# Altium PCB 驱动2.PcbDoc
Units mil, origin at the board's own origin, x right, y up, seen from the top; angles counter-clockwise.
Board outline 4485 x 2050.55 mil, 2 copper layers (Top Layer, Bottom Layer); 41 components, 33 nets, 128 pads, 48 vias.
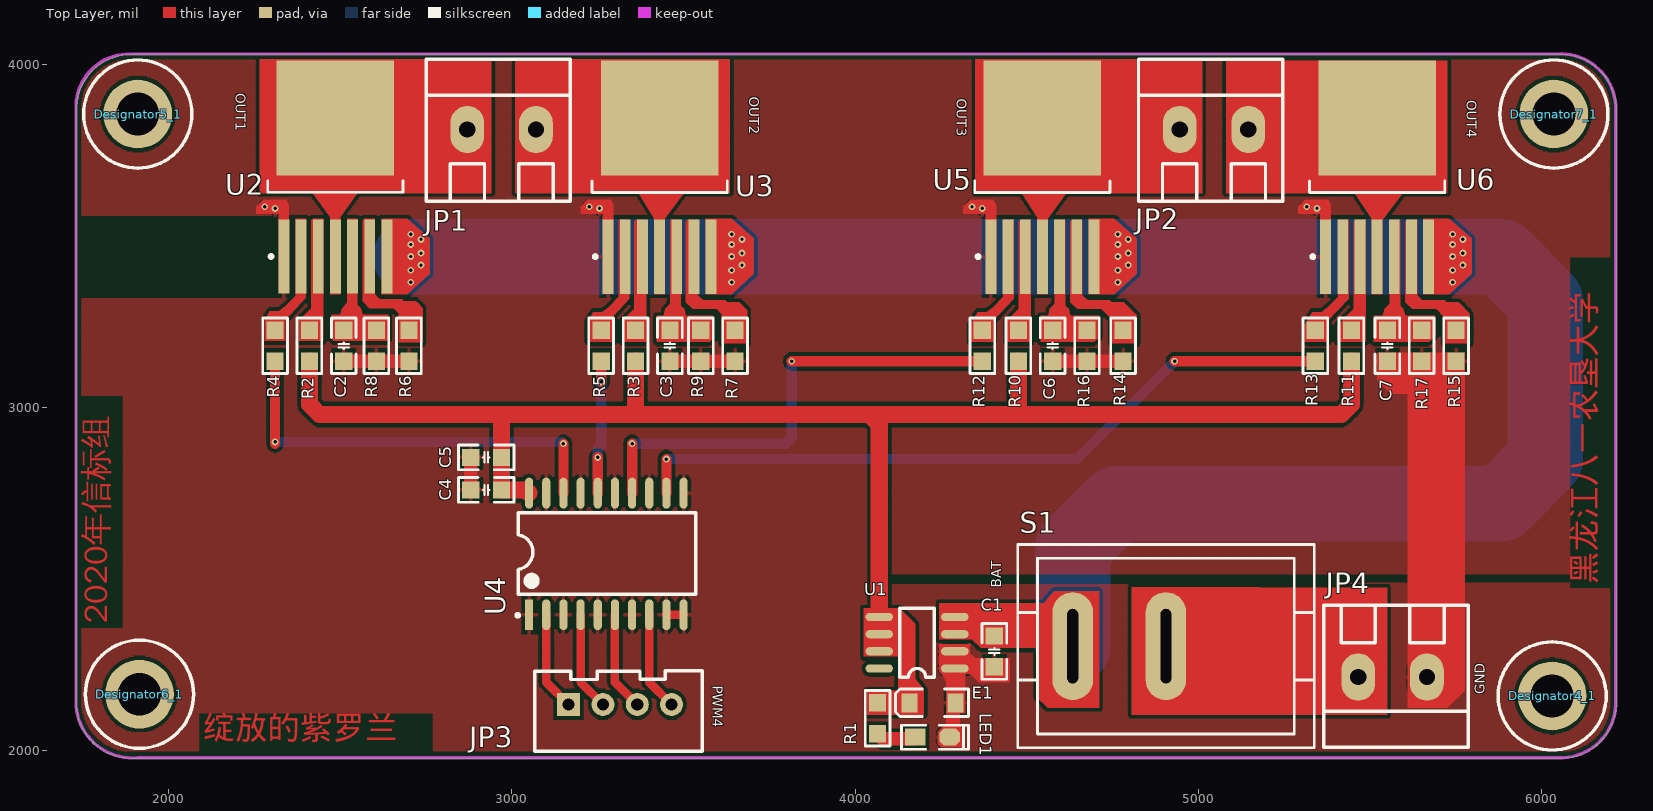
[diagram p0: Top Layer view]
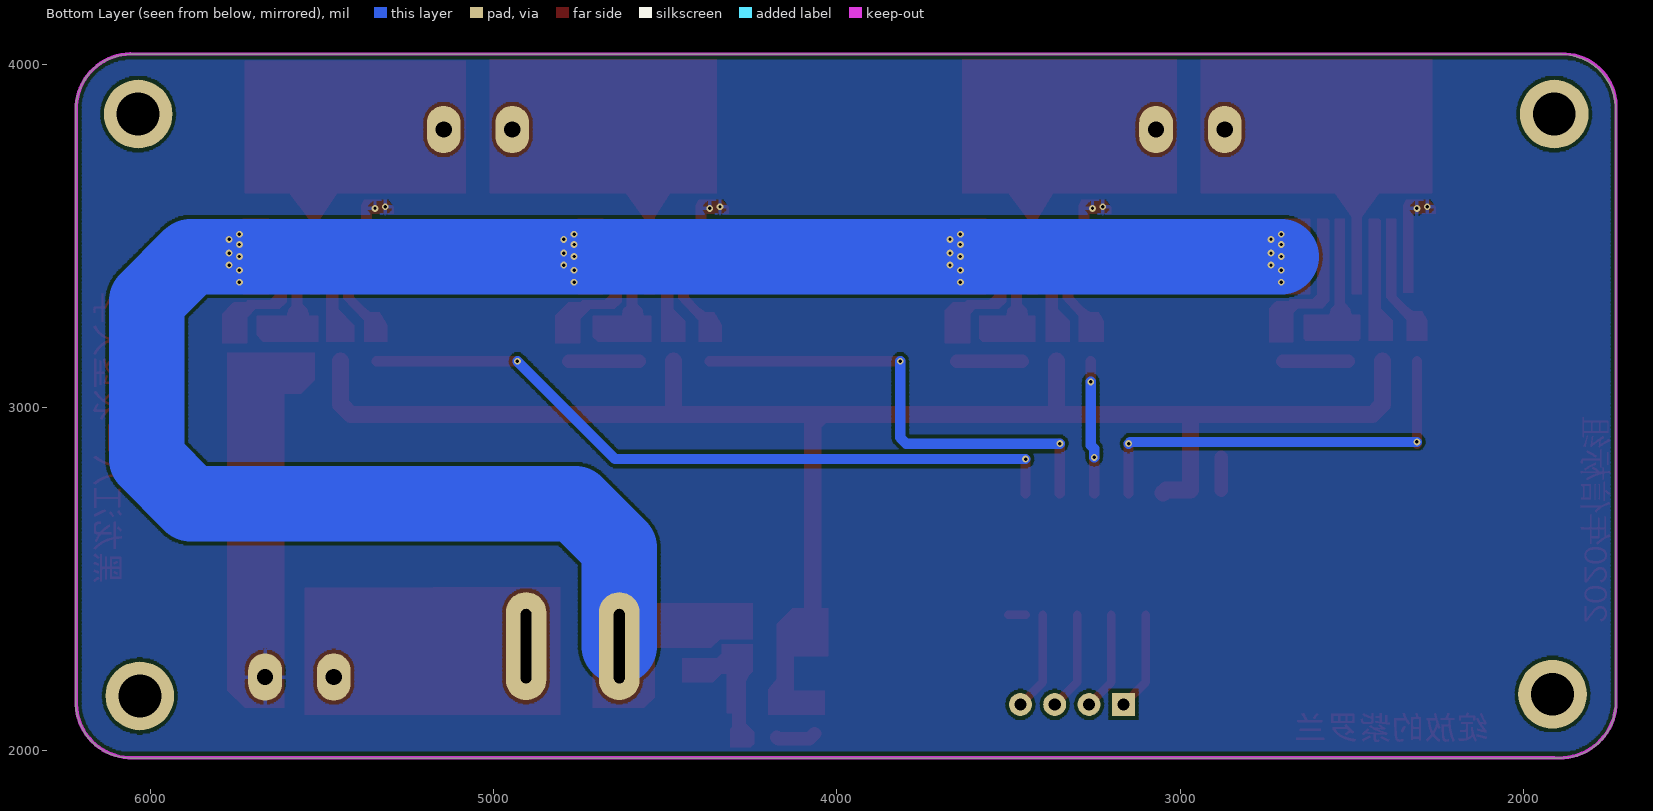
[diagram p1: Bottom Layer view, seen from below]

## Layer stack, top to bottom
Top Solder: solder mask 0.4, Solder Resist, Dk 3.5
Top Layer: signal copper 1.4
Dielectric 1: dielectric 12.6, FR-4, Dk 4.8
Bottom Layer: signal copper 1.4
Bottom Solder: solder mask 0.4, Solder Resist, Dk 3.5

## Board outline
1731,2130 1731,3878 cw(c1892,3868) 1902,4029 6045,4029 cw(c6055,3868) 6216,3878 6216,2130 cw(c6055,2140) 6045,1979 1902,1979 cw(c1892,2140)

## Design rules (kind name [scope] priority, off if disabled: settings)
Clearance [All] p1: gap=10 ignorepadtopadclearanceinfootprint=FALSE except(0: Arc-Hole Track-Hole SMDPad-Hole THPad-Hole Via-Hole Fill-Hole Poly-Hole Region-Hole Text-Hole)
HoleSize [All] p1: absolutevalues=TRUE maxlimit=300 minlimit=1 maxpercent=80.000 minpercent=20.000
HoleToHoleClearance [All] p1: gap=0 allowstackedmicrovias=TRUE
MinimumSolderMaskSliver [All] p1: minsoldermaskwidth=0
PolygonConnect [All] p1: connectstyle=Relief reliefconductorwidth=10 reliefentries=4 polygonreliefangle="90 Angle" airgapwidth=10
RoutingVias [All] p1: holewidth=20 width=20 viastyle="Through Hole" minholewidth=10 minwidth=20 maxholewidth=20 maxwidth=50
SilkToSilkClearance [All] p1: silktosilkclearance=0
SilkToSolderMaskClearance [IsPad] p1: minsilkscreentomaskgap=0 clearancetoexposedcopper=TRUE
SolderMaskExpansion [All] p1: expansion=4 istentingtop=FALSE
Width [All] p1: maxlimit=230 minlimit=10 preferedwidth=60
25 further rules are at their usual default settings.

## Classes and differential pairs
component class 驱动2: C1 C2 C3 C4 C5 C6 C7 E1 JP1 JP2 JP3 JP4 LED1 R1 R2 R3 R4 R5 R6 R7 R8 R9 R10 R11 R12 R13 R14 R15 R16 R17 S1 U1 U2 U3 U4 U5 U6

## Components (designator, comment, footprint, x,y, rotation, side; value= is the part's Value field where it differs from the comment)
C1 "104" "C 0805_M" 4405,2290 r90 top
C2 "104" "C 0805_M" 2510,3180 r270 top
C3 "104" "C 0805_M" 3460,3180 r270 top
C4 "104" "C 0805_M" 2925,2760 r180 top
C5 "104" "C 0805_M" 2925,2855 r180 top
C6 "104" "C 0805_M" 4575,3180 r270 top
C7 "104" "C 0805_M" 5550,3180 r270 top
Designator4_1 "Comment" M3x10_L 6030,2160 r0 top
Designator5_1 "Comment" M3x10_L 1910,3855 r0 top
Designator6_1 "Comment" M3x10_L 1915,2165 r0 top
Designator7_1 "Comment" M3x10_L 6035,3855 r0 top
E1 "10uF/6.3V" "CD A(3216)" 4225,2140 r0 top
JP1 "HDR-1X2" KF128-5.08-2P 2970,3810 r0 top
JP2 "HDR-1X2" KF128-5.08-2P 5045,3810 r0 top
JP3 "HDR-1X4" XH2.54-LI-4P 3315,2135 r0 top
JP4 "HDR-1X2" KF128-5.08-2P 5565,2215 r180 top
LED1 "红色" "LED 0805G" 4225,2040 r0 top
R1 "5k" "R 0805_M" 4065,2095 r270 top
R2 "3.3k" "R 0805_M" 2410,3180 r270 top
R3 "3.3k" "R 0805_M" 3360,3180 r270 top
R4 "1k" "R 0805_M" 2310,3180 r270 top
R5 "1k" "R 0805_M" 3260,3180 r270 top
R6 "3.3k" "R 0805_M" 2700,3180 r270 top
R7 "3.3k" "R 0805_M" 3650,3180 r270 top
R8 "3.3k" "R 0805_M" 2605,3180 r270 top
R9 "3.3k" "R 0805_M" 3550,3180 r270 top
R10 "3.3k" "R 0805_M" 4475,3180 r270 top
R11 "3.3k" "R 0805_M" 5445,3180 r270 top
R12 "1k" "R 0805_M" 4370,3180 r270 top
R13 "1k" "R 0805_M" 5340,3180 r270 top
R14 "3.3k" "R 0805_M" 4780,3180 r270 top
R15 "3.3k" "R 0805_M" 5750,3180 r270 top
R16 "3.3k" "R 0805_M" 4675,3180 r270 top
R17 "3.3k" "R 0805_M" 5650,3180 r270 top
S1 "KCD1-101" KCD1-101 4905,2305 r180 top
U1 "TPS7350" SOP8 4289,2239 r180 top
U2 "BTN7971" DPAK127P1615X127-8N 2485.79,3670.45 r90 top
U3 "BTN7971" DPAK127P1615X127-8N 3430,3670 r90 top
U4 "74LS244" SOP20 3250,2575 r90 top
U5 "BTN7971" DPAK127P1615X127-8N 4545,3670 r90 top
U6 "BTN7971" DPAK127P1615X127-8N 5520,3670 r90 top

## Footprints (in the part's own frame and the unit in brackets; to place one, negate y for a bottom-side part, rotate by r counter-clockwise, add the part's x,y. Pads: shape width x height; smd on the part's side, far side on the other; paste and mask are expansions set on the pad)
"C 0805_M" [mil] "无极性贴片电容"
  rect 50x50 smd: 1(-45,0) 2(45,0)
  silkscreen extent -81,-36 81,36, body extent -39,-24 39,24, height 20
"CD A(3216)" [mm] "长3.2mm，宽1.6mm，厚1.6mm"
  rect 1.2x1.4 smd: 1(-1.7,0) 2(1.7,0)
  silkscreen extent -2.74,-1.02 2.67,1.02, body extent -1.6,-0.8 1.6,0.8, height 1.6
DPAK127P1615X127-8N [mm] "TO, 8-Pads, Body 7.23x8.36mm (max), IPC Medium Density"
  rect 5.5x0.8 smd: 1(-5.85,3.81) 2(-5.85,2.54) 3(-5.85,1.27) 4(-5.85,0) 5(-5.85,-1.27) 6(-5.85,-2.54) 7(-5.85,-3.81)
  rect 8.5x8.7 smd: 8(4.4,0)
  silkscreen extent -5.97,-5 -0.25,5, body extent -1.1,-5 7.15,5, height 1.27
KCD1-101 [mm] "船型开关立式"
  oval 3x8 hole 0.8 slot 5.5 at 90 deg: 1(0,0) 2(6.9,0)
  silkscreen extent -10.97,-7.52 10.97,7.52, body extent -10.95,-7.5 10.95,7.5, height 20.3
KF128-5.08-2P [mm] "螺钉式接线端子，脚距5.08mm"
  oval 2.5x3.5 hole 1.2: 1(-2.54,0) 2(2.54,0)
  silkscreen extent -5.59,-5.31 5.08,5.21, body extent -5.58,-5.3 5.08,5.2, height 14.15
"LED 0805G" [mil] "绿色0805LED"
  rect 60x50 smd: 1(-50,0)
  oct 60x50 smd: 2(50,0)
  silkscreen extent -90,-35 105,35, body extent -39,-25 39,25, height 32
M3x10_L [mil] "M3铜柱，长：10mm"
  round 200 hole 125: 1(0,0)
  silkscreen extent -157,-157 157,157, body extent -106,-93 106,93, height 396
"R 0805_M" [mil] "1/8W贴片电阻"
  rect 50x50 smd: 1(-45,0) 2(45,0)
  silkscreen extent -81,-36 81,36, body extent -39,-25 39,25, height 20
SOP8 [mil] "（蒜米工坊）"
  oval 80x24 smd: 1(-1,-1) 2(-1,-51) 3(-1,-101) 4(-1,-151) 5(219,-151) 6(219,-101) 7(219,-51) 8(219,-1)
  silkscreen extent 59,-176 159,24, body extent -4,-174 234,24, height 63
SOP20 [mil] "（蒜米工坊）"
  rect 90x23.62 smd: 1(-178.5,200)
  oval 90x23.62 smd: 2(-178.5,150) 3(-178.5,100) 4(-178.5,50) 5(-178.5,0) 6(-178.5,-50) 7(-178.5,-100) 8(-178.5,-150) 9(-178.5,-200) 10(-178.9,-250) 11(175.8,-250) 12(175.8,-200) 13(175.8,-150) 14(175.8,-100) 15(175.8,-50) 16(175.8,0) 17(175.8,50) 18(175.8,100) 19(175.8,150) 20(175.8,200)
  silkscreen extent -185,-285 119,238, body extent -203,-277 203,227, height 106
XH2.54-LI-4P [mm] "接插件，4P"
  rect 1.7x1.7 hole 0.9: 1(-3.81,0)
  round 1.7 hole 0.9: 2(-1.27,0) 3(1.27,0) 4(3.81,0)
  silkscreen extent -6.3,-3.45 6.07,2.49, body extent -6.31,-3.3 6.31,2.4, height 7.03

## Part data
C1 C2 C3 C4 C5 C6 C7: library part C, "无极性贴片电容", BOM名称=无极性贴片电容, 版权归属=源创客, 学习资源=www.ooocke.com
E1: library part C-CD, "贴片钽电容", BOM名称=贴片钽电容, 版权归属=源创客, 学习资源=www.ooocke.com
JP1 JP2 JP4: library part "Header 2", "2P接插件", BOM名称=2P接插件, 版权归属=源创客, 学习资源=www.ooocke.com
JP3: library part "Header 4", "4P接插件", BOM名称=4P接插件, 版权归属=源创客, 学习资源=www.ooocke.com
LED1: library part LED-SMD, "贴片LED", BOM名称=贴片LED, 版权归属=源创客, 学习资源=www.ooocke.com
R1 R2 R3 R4 R5 R6 R7 R8 R9 R10 R11 R12 R13 R14 R15 R16 R17: library part R, "贴片电阻", BOM名称=贴片电阻, 版权归属=源创客, 学习资源=www.ooocke.com
S1: "1路单刀船型开关", BOM名称=1路单刀船型开关, 版权归属=源创客, 学习资源=www.ooocke.com
U1: "稳压"

## Via types
v1: diameter 20, hole 10, Top Layer to Bottom Layer, 48 vias

## Nets (pads, with @x,y where several pads share a name; then routed paths per layer and width w, separated by ;. In a path a pad name is that pad's centre, name@x,y a point inside that pad or via, vN(x,y) a via of type N, cw(c..) or ccw(c..) an arc to the next point about the centre after c; other vN are vias at no path point)
+5: C4.1 C5.1 E1.1 R1.1 R2.2 R3.2 R10.2 R11.2 U1.5 U1.6 U1.7 U4.20 | length 4576.6
  Top Layer w30: C4.1 C4.1@2979.2,2750.8
  Top Layer w50: R2.2 2410,3009.29 2439.29,2980 2970,2980 ; U4.20 3040.8,2760 C4.1 C5.1 2970,2980 ; R3.2 3360,2990 3370,2980 ; U1.6 U1.5 4070,2950.71 4040.71,2980 ; 4475,2997.14 R10.2 ; R11.2 5445,3009.29 5415.71,2980 4040.71,2980 ; 2970,2980 3370,2980 ; 3370,2980 4040.71,2980
+7.2V: JP4.2 S1.1 | length 9.3
  Top Layer w60: JP4.2 JP4.2@5465,2224.29
BAT: C1.2 S1.2 U1.3 U1.4 U2.7 U3.7 U5.7 U6.7 | length 5590.2
  Bottom Layer w220: v1(2705,3440) v1(3640,3440) v1(4765,3440) v1(5740,3440) 5881.13,3440 6010,3311.13 6010,2848.87 5881.13,2720 4762.22,2720 4633.35,2591.13 S1.2
  other v1: 2705,3365 3640,3365 4765,3365 5740,3365 2705,3400 3640,3400 4765,3400 5740,3400 2735,3415 3670,3415 4795,3415 5770,3415 2735,3450 3670,3450 4795,3450 5770,3450 2705,3475 3640,3475 4765,3475 5740,3475 2735,3490 3670,3490 4795,3490 5770,3490 2705,3505 3640,3505 4765,3505 5740,3505
GND: C1.1 C2.2 C3.2 C4.2 C5.2 C6.2 C7.2 E1.2 JP4.1 LED1.2 R6.2 R7.2 R8.2 R9.2 R14.2 R15.2 R16.2 R17.2 U1.1 U1.2 U2.1 U3.1 U4.1 U4.3 U4.5 U4.7 U4.9 U4.10 U4.11 U4.13 U4.15 U4.17 U4.19 U5.1 U6.1 | length 998.3
  Top Layer w25: U4.9 3499.61,2396.5 U4.10
  Top Layer w40: C2.2 R8.2 R6.2 ; C4.2 C5.2 ; C3.2 R9.2 R7.2 ; C6.2 R16.2 R14.2 ; C7.2 R17.2 R15.2
  Top Layer w50: C1.1 C1.1@4420,2230 ; JP4.1@5655,2172.21 5665,2182.21 JP4.1
  other v1: 2310,3580 3255,3580 4370,3580 5345,3580 2280,3585 3225,3585 4340,3585 5315,3585
NetC2_1: C2.1 R8.1 U2.5
NetC3_1: C3.1 R9.1 U3.5
NetC6_1: C6.1 R16.1 U5.5
NetC7_1: C7.1 R17.1 U6.5
NetLED1_1: LED1.1 R1.2 | length 118.3
  Top Layer w40: R1.2 4080,2035 4170,2035 LED1.1
NetR2_1: R2.1 U2.3
NetR3_1: R3.1 U3.3
NetR4_1: R4.1 U2.2
NetR5_1: R5.1 U3.2
NetR6_1: R6.1 U2.6
NetR7_1: R7.1 U3.6
NetR10_1: R10.1 U5.3
NetR11_1: R11.1 U6.3
NetR12_1: R12.1 U5.2
NetR13_1: R13.1 U6.2
NetR14_1: R14.1 U5.6
NetR15_1: R15.1 U6.6
OUT1: JP1.1 U2.4 U2.8
OUT2: JP1.2 U3.4 U3.8
OUT3: JP2.1 U5.4 U5.8
OUT4: JP2.2 U6.4 U6.8
P1: R4.2 U4.18 | length 1226.3
  Top Layer w30: v1@2310,2895 v1(2310,2900) R4.2 ; U4.18 v1(3150,2895)
  Bottom Layer w30: v1(2310,2900) 3145,2900 v1(3150,2895)
P2: R5.2 U4.16 | length 388.3
  Top Layer w30: U4.16 v1(3250,2855) ; v1(3260,3075) R5.2
  Bottom Layer w30: v1(3250,2855) 3250,2880 3260,2890 v1(3260,3075)
P3: R12.2 U4.14 | length 1393.9
  Top Layer w30: U4.14 v1(3350,2895) ; v1(3815,3135) R12.2
  Bottom Layer w30: v1(3350,2895) 3797.43,2895 3815,2912.57 v1(3815,3135)
P4: R13.2 U4.12 | length 2107.2
  Top Layer w30: U4.12 v1(3450,2850) ; v1(4930,3135) R13.2
  Bottom Layer w30: v1(3450,2850) 4645,2850 v1(4930,3135)
PWM1: JP3.1 U4.2 | length 288.4
  Top Layer w25: U4.2 3100,2200 JP3.1
PWM2: JP3.2 U4.4 | length 288.4
  Top Layer w25: U4.4 3200,2200 JP3.2
PWM3: JP3.3 U4.6 | length 288.4
  Top Layer w25: U4.6 3300,2200 JP3.3
PWM4: JP3.4 U4.8 | length 288.4
  Top Layer w25: U4.8 3400,2200 JP3.4
pads on no net: Designator4_1.1 Designator5_1.1 Designator6_1.1 Designator7_1.1 U1.8

## Polygon pours and split planes (outlines as drawn)
GND on Top Layer "GND_L01_P010" (hatched Horizontal grid 4 track 5, remove dead copper, pour order 10): 1640,4115 6490,4115 6340,3965 6340,1850 1630,1850 1610,1870
GND on Top Layer "GND_L01_P001" (hatched Horizontal grid 4 track 5, remove dead copper, pour order 1): 1480,4365
GND on Bottom Layer "GND_L02_P011" (hatched Horizontal grid 4 track 5, remove dead copper, pour order 11): 1595,4270 1615,4250 6625,4250 6625,1910 6340,1625 6195,1770 1475,1770

## Keep-outs
Keep-Out Layer:
  lines w10: 6050,1980 ccw(c6055,2140) 6215,2135 6215,3880 ccw(c6055,3870) 6045,4030 1890,4030 ccw(c1885,3875) 1730,3880 1730,2130 ccw(c1895,2145) 1910,1980 6060,1980

## Other copper
Top Layer:
  region net GND: 5520,3160 5775,3160 5775,2175 5725,2125 5610,2125 5610,2465 5610,2470 5610,2475 5610,3040 5560,3040 5520,3080
  region net GND: 5355,3335 5385,3335 5385,3590 5377.5,3605 5310,3605 5290,3585 5290,3565 5355,3565
  region net GND: 4380,3335 4410,3335 4410,3590 4402.5,3605 4335,3605 4315,3585 4315,3565 4380,3565
  region net GND: 3265,3335 3295,3335 3295,3590 3287.5,3605 3220,3605 3200,3585 3200,3565 3265,3565
  region net +5: 4200,2105 4200,2175 4200,2179 4175,2210 4175,2370 4130,2415 4025,2415 4025,2275 4125,2275 4125,2175 4035,2175 4035,2105
  region net NetR13_1: 5406.73,3547.23 5436.73,3547.23 5436.73,3317.23 5376.73,3252.23 5376.73,3192.23 5310,3192.23 5310,3241.02 5331.73,3277.23 5356.73,3277.23 5376.73,3292.23 5406.73,3322.23
  region net NetR11_1: 5456.73,3547.23 5486.73,3547.23 5486.73,3192.23 5405,3192.23 5405,3240.51 5451.73,3287.23 5451.73,3542.23
  region net NetC7_1: 5586.73,3297.23 5596.73,3287.23 5601.73,3267.23 5690,3267.23 5690,3210.51 5671.73,3192.23 5510,3192.23 5510,3267.23 5536.73,3267.23 5541.73,3287.23 5556.73,3302.23 5556.73,3547.23 5586.73,3547.23
  region net NetR15_1: 5636.73,3327.23 5651.73,3312.23 5716.73,3312.23 5721.73,3307.23 5756.73,3307.23 5761.73,3302.23 5790,3273.96 5790,3187.23 5716.73,3187.23 5716.73,3262.23 5691.73,3287.23 5621.73,3287.23 5601.73,3307.23 5601.73,3542.23 5606.73,3547.23 5636.73,3547.23
  region net NetR12_1: 4431.73,3547.23 4461.73,3547.23 4461.73,3317.23 4401.73,3252.23 4401.73,3192.23 4335,3192.23 4335,3241.02 4356.73,3277.23 4381.73,3277.23 4401.73,3292.23 4431.73,3322.23
  region net NetR10_1: 4481.73,3547.23 4511.73,3547.23 4511.73,3192.23 4441.73,3192.23 4441.73,3252.23 4476.73,3287.23 4476.73,3542.23
  region net NetC6_1: 4611.73,3297.23 4621.73,3287.23 4626.73,3267.23 4710,3267.23 4710,3205.51 4696.73,3192.23 4540,3192.23 4540,3267.23 4561.73,3267.23 4566.73,3287.23 4581.73,3302.23 4581.73,3547.23 4611.73,3547.23
  region net NetR14_1: 4661.73,3327.23 4676.73,3312.23 4741.73,3312.23 4746.73,3307.23 4781.73,3307.23 4786.73,3302.23 4820,3268.96 4820,3187.23 4746.73,3187.23 4746.73,3257.23 4716.73,3287.23 4646.73,3287.23 4626.73,3307.23 4626.73,3542.23 4631.73,3547.23 4661.73,3547.23
  region net NetR5_1: 3311.73,3547.23 3341.73,3547.23 3341.73,3317.23 3295,3266.61 3295,3192.23 3221.73,3192.23 3221.73,3252.23 3236.73,3277.23 3261.73,3277.23 3281.73,3292.23 3311.73,3322.23
  region net NetR3_1: 3361.73,3547.23 3391.73,3547.23 3391.73,3192.23 3321.73,3192.23 3321.73,3252.23 3356.73,3287.23 3356.73,3542.23
  region net NetC3_1: 3491.73,3297.23 3501.73,3287.23 3506.73,3267.23 3585,3267.23 3585,3200.51 3576.73,3192.23 3421.73,3192.23 3421.73,3267.23 3441.73,3267.23 3446.73,3287.23 3461.73,3302.23 3461.73,3547.23 3491.73,3547.23
  region net NetR7_1: 3541.73,3327.23 3556.73,3312.23 3621.73,3312.23 3626.73,3307.23 3661.73,3307.23 3666.73,3302.23 3685,3283.96 3685,3187.23 3611.73,3187.23 3611.73,3272.23 3596.73,3287.23 3526.73,3287.23 3506.73,3307.23 3506.73,3542.23 3511.73,3547.23 3541.73,3547.23
  region net BAT: 5655,3550 5655,3330 5730,3330 5795,3390 5795,3492.5 5750,3515 5795,3492.5 5730,3550
  region net BAT: 4680,3550 4680,3330 4755,3330 4820,3390 4820,3492.5 4775,3515 4820,3492.5 4755,3550
  region net BAT: 3565,3550 3565,3330 3640,3330 3705,3390 3705,3492.5 3660,3515 3705,3492.5 3640,3550
  region net BAT: 2620,3550 2620,3330 2695,3330 2760,3390 2760,3492.5 2715,3515 2760,3492.5 2695,3550
  region net NetR6_1: 2600,3330 2615,3315 2680,3315 2685,3310 2720,3310 2725,3305 2740,3290 2740,3190 2670,3190 2670,3275 2655,3290 2585,3290 2565,3310 2565,3545 2570,3550 2600,3550
  region net NetC2_1: 2550,3300 2560,3290 2565,3270 2640,3270 2640,3200 2635,3195 2480,3195 2475,3200 2475,3270 2500,3270 2505,3290 2520,3305 2520,3550 2550,3550
  region net NetR2_1: 2420,3550 2450,3550 2450,3195 2380,3195 2380,3255 2415,3290 2415,3545
  region net NetR4_1: 2370,3550 2400,3550 2400,3320 2340,3255 2340,3195 2280,3195 2280,3255 2295,3280 2320,3280 2340,3295 2370,3325
  region: 2370,3550
  region net GND: 2320,3335 2350,3335 2350,3590 2342.5,3605 2275,3605 2255,3585 2255,3565 2320,3565
  region: 2320,3335
  region net OUT4: 5080,4010 5080,3625 5375,3625 5395,3625 5395,4010
  region net OUT4: 5330,4010 5330,3625 5335,3625 5455,3625 5505,3550 5505,3330 5535,3330 5535,3545 5595,3625 5575,3625 5725,3625 5725,4010
  region net OUT3: 4350,4015 4350,3625 4485,3625 4530,3555 4530,3330 4560,3330 4560,3550 4615,3625 5010,3625 5010,3630 5010,4015
  region net OUT2: 3010,4015 3010,3625 3370,3625 3415,3550 3415,3330 3445,3330 3445,3550 3500,3625 3635,3625 3635,4015
  region net OUT1: 2940,4015 2265,4015 2265,3625 2420,3625 2470,3555 2470,3329.51 2500,3330.24 2500,3555 2550,3625 2940,3625
  region net GND: 4250,2225 4255,2220 4265,2200 4265,2080 4240,2055 4240,2020 4250,2010 4310,2010 4310,2065 4305,2070 4305,2110 4320,2110 4320,2225
  region net GND: 4450,2200 4360,2200 4335,2225 4250,2225 4245,2230 4245,2310 4335,2310 4335,2285 4350,2270 4450,2270
  region net BAT: 4245,2430 4335.45,2430 4370,2385 4370,2305 4365,2300 4340,2325 4245,2325
  region: 4400,2500
  region net BAT: 4710,2465 4710,2460 4710,2125 4560,2125 4530,2155 4530,2300 4440,2300 4365,2300 4335.45,2430 4548.57,2430 4570,2455 4580,2465
  region net +7.2V: 4805,2477.95 5549.2,2474.8 5549.2,2223.81 5549.2,2105 4805,2105
  text "黑龙江八一农垦大学" at 6180,2485 h118.11 r90
  text "2020年信标组" at 1845,2370 h118.11 r90
  text "绽放的紫罗兰" at 2100,2010 h118.11

## Silkscreen, mask and mechanical layers (free items; w line width, h text height)
Top Overlay:
  text "OUT1" at 2185.55,3915 h50 r270
  text "OUT2" at 3680.55,3905 h50 r270
  text "OUT3" at 4285.55,3900 h50 r270
  text "OUT4" at 5770.55,3895 h50 r270
  text "BAT" at 4435,2475 h50 r90
  text "PWM4" at 3575,2190 h50 r270
  text "GND" at 5844.45,2165 h50 r90